# EAGLE board Sensor de estufa (EAGLE 9.7.0)

Size 104.96 x 115.73 mm. Coordinates in mm from the lower left corner, seen from the top.
Outline: 0,0 104.96,0 104.96,115.73 0,115.73 0,0
Copper layers (1*16): Top 0.035mm / dielectric 1.5mm / Bottom 0.035mm
Design rules "default": minimum track width 6mil, minimum drill 0.35mm, track to track 6mil, track to pad 6mil, pad to pad 6mil, via to via 6mil, smd to smd 6mil, copper to edge 40mil, drill to drill 6mil, minimum pad ring 10mil, minimum via ring 8mil, stop-mask expansion 4mil, vias tented up to drill 0mil, thermal gap 10mil

## Footprints (pad centres in the part's own frame; a part is rotated, then mirrored left to right if it is on the bottom)
LEDRD254W60D565H860B = drill 0.981 pad 1.581: 1 -1.27,0; 2 1.27,0
MOTOR = drill 1.118 pad 3.15 octagon: + 2.54,0; - -2.54,0
PIEZO = drill 1 pad 1.6: 1 -3.5,0; 2 3.5,0
RESAD1016W63L850D250B = drill 0.83 pad 1.43: 1 -5.08,0; 2 5.08,0
ARDUINO-UNO-R3-SHIELD = drill 1.016 pad 1.88: 3.3V 24.13,-2.54; 5V 24.13,0; A0 24.13,12.7; A1 24.13,15.24; A2 24.13,17.78; A3 24.13,20.32; A4 24.13,22.86; A5 24.13,25.4; AREF -24.13,-13.97; D2 -24.13,20.32; D3 -24.13,17.78; D4 -24.13,15.24; D5 -24.13,12.7; D6 -24.13,10.16; D7 -24.13,7.62; D8 -24.13,3.81; D9 -24.13,1.27; D10 -24.13,-1.27; D11 -24.13,-3.81; D12 -24.13,-6.35; D13 -24.13,-8.89; GND@0 24.13,2.54; GND@1 24.13,5.08; GND@2 -24.13,-11.43; IOREF 24.13,-7.62; NC 24.13,-10.16; RES 24.13,-5.08; RX -24.13,25.4; SCL -24.13,-19.05; SDA -24.13,-16.51; TX -24.13,22.86; VIN 24.13,7.62
TO92 = drill 0.813 octagon: 1 -1.27,0; 2 0,1.905; 3 1.27,0

## Placement (x,y rotation side)
D1  RED  [LEDRD254W60D565H860B]  87.41,31.94 90 top
M1  MOTOR_HDR  [MOTOR]  96.7,76.29 0 top
PIEZO1  PIEZO  [PIEZO]  40.91,13.58 180 top
R1  220  [RESAD1016W63L850D250B]  70.14,37.11 270 top
U2  ARDUINO-UNO-R3-SHIELD  [ARDUINO-UNO-R3-SHIELD]  46.01,67.84 180 top
U3  TMP36GT9Z_TO92  [TO92]  6.1,59.81 90 top

## Library data of the parts
D1 = Tinkercad; CATEGORY: Opto-Electronic; SUB-CATEGORY: LED; VALUE: LED_RED
M1 PIEZO1 R1 U2 U3 = Tinkercad

## Nets
D1_A: D1.1 PIEZO1.1 R1.2
U2_3.3V: U2.3.3V U3.3
U2_A0: U2.A0 U3.2
U2_D7: M1.+ U2.D7
U2_GND: D1.2 M1.- PIEZO1.2 U2.GND@0 U2.GND@1 U2.GND@2 U3.1
U2_RX: R1.1 U2.RX

## Tracks (layer width: path | path; a pad name or v marks a point on that pad's centre or on a via)
D1_A  (2 unrouted)
U2_3.3V  (1 unrouted)
U2_A0  (1 unrouted)
U2_D7  (1 unrouted)
U2_GND  (6 unrouted)
U2_RX  (1 unrouted)